# Altium PCB BMS_V3.PcbDoc (part 1 of 2)
Units mil, origin at the board's own origin, x right, y up, seen from the top; angles counter-clockwise.
Board outline 3937.01 x 3137.8 mil, 2 copper layers (Top Layer, Bottom Layer), stack 62.181 mil thick; 110 components, 133 nets, 421 pads, 75 vias.
Unrouted connection lines stored in the file: 4.
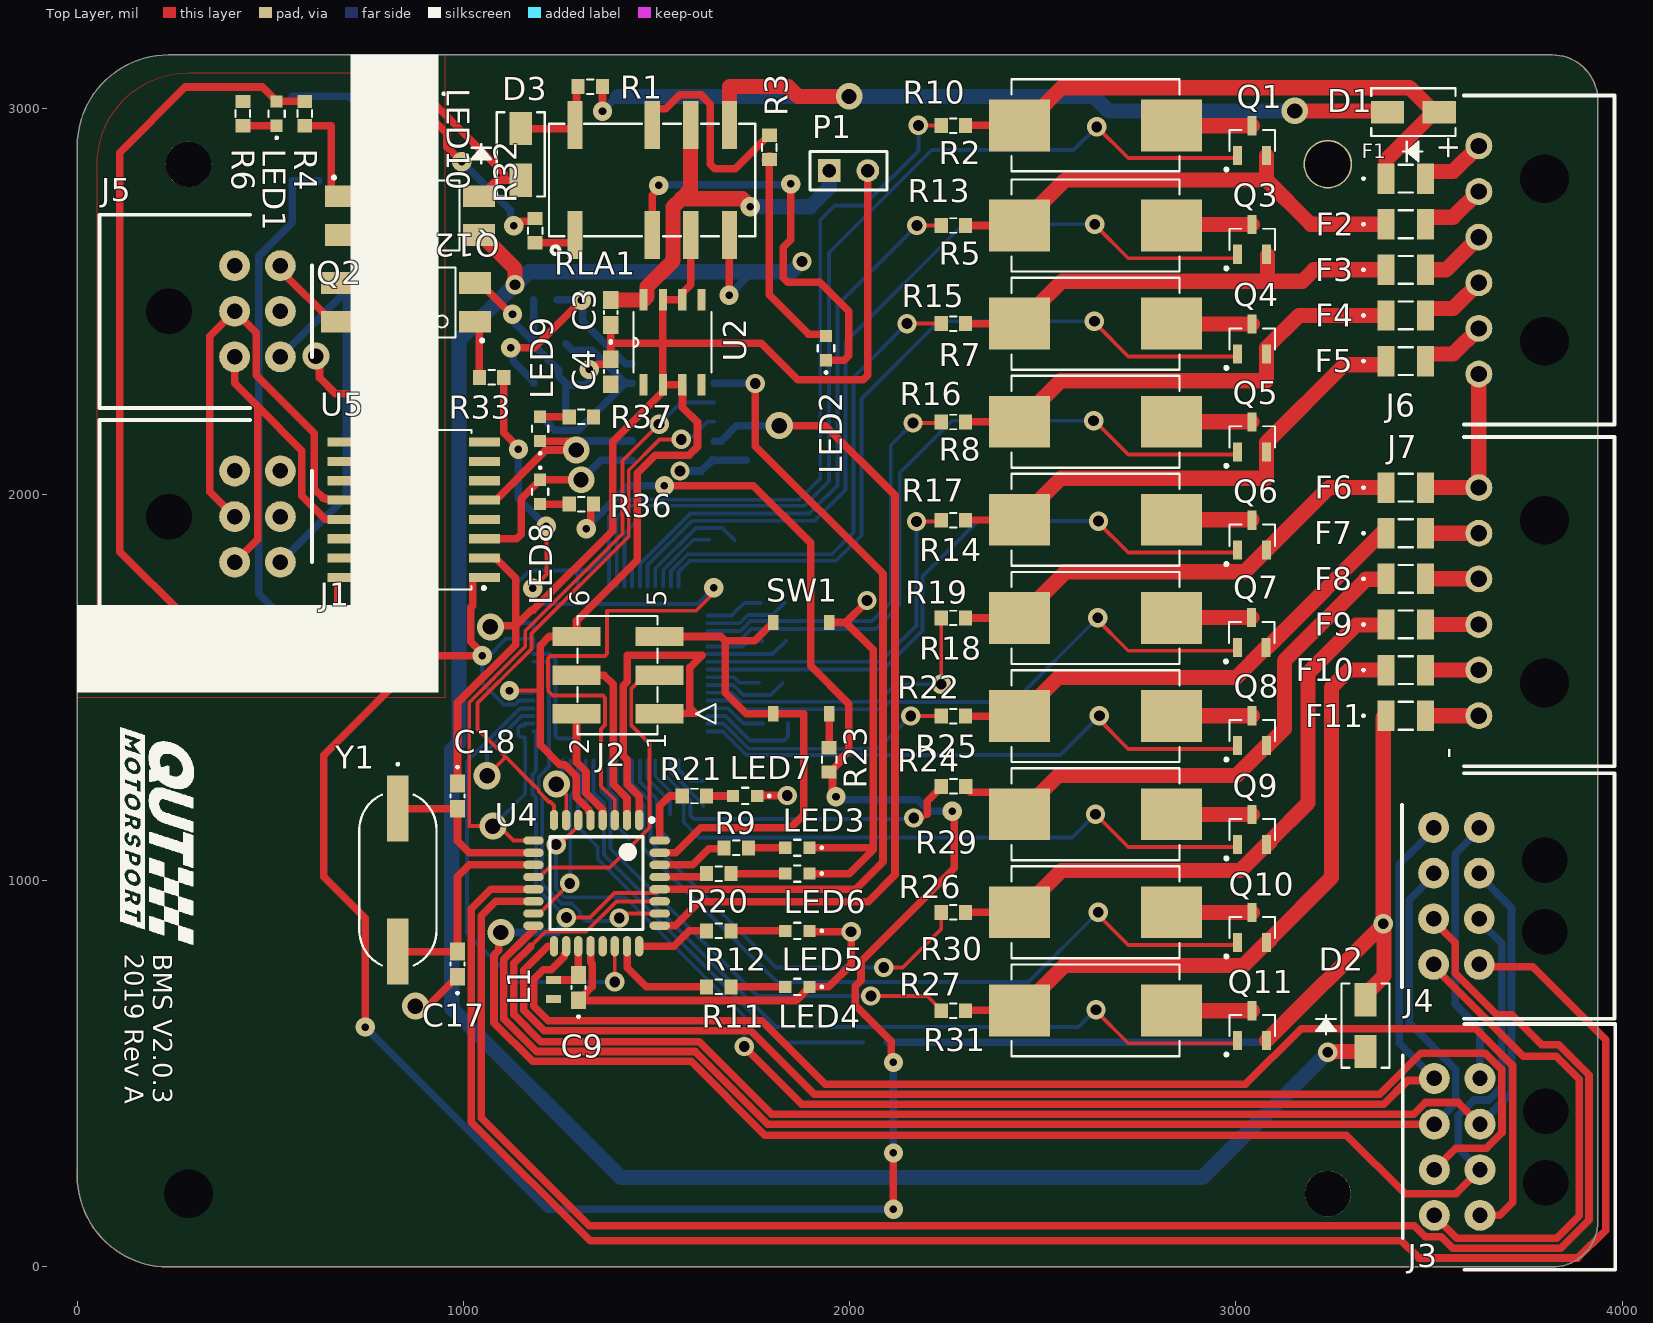
[diagram p0: Top Layer view]
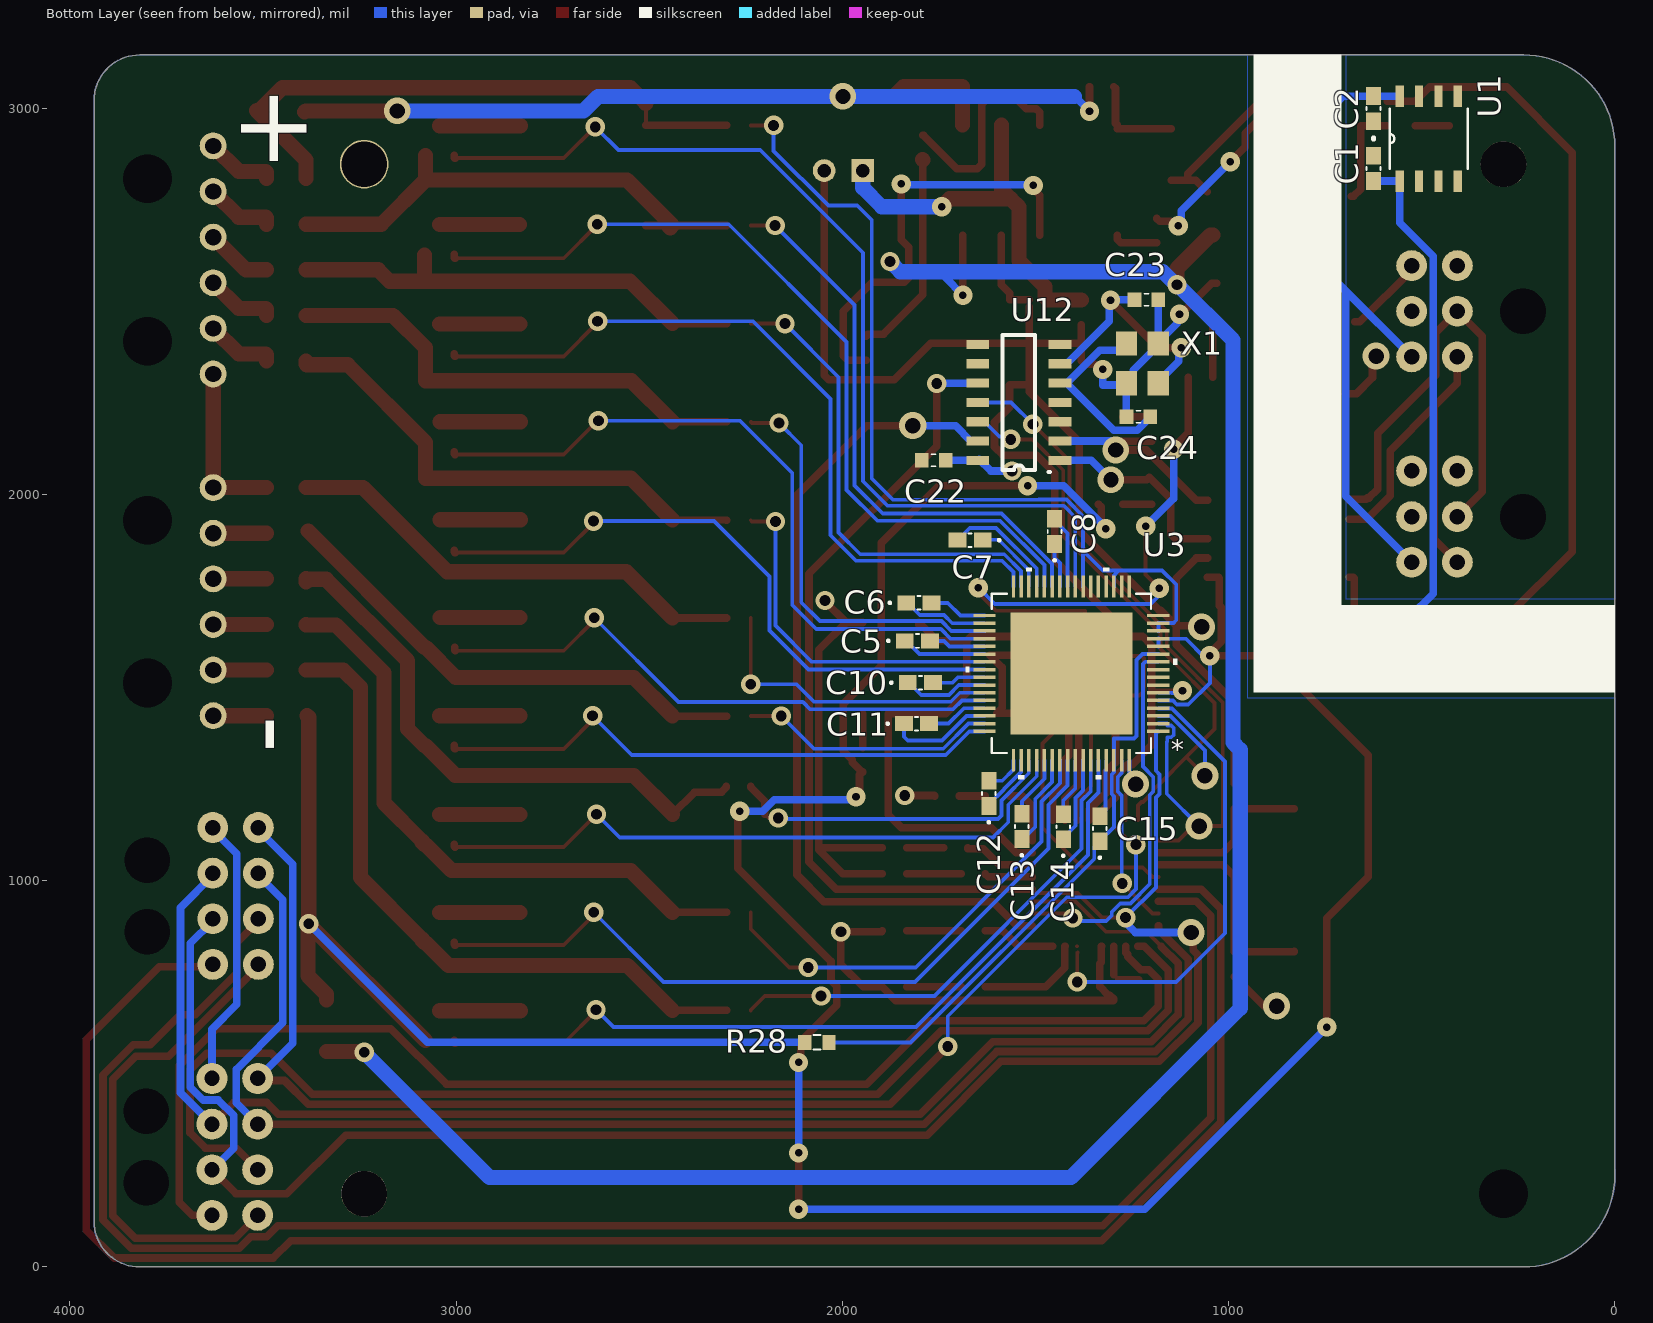
[diagram p1: Bottom Layer view, seen from below]

## Layer stack, top to bottom
Top Solder: solder mask 0.4, Solder Resist, Dk 3.5
Top Layer: signal copper 1.3661
Dielectric 1: dielectric 59.4488, FR-4, Dk 4.8
Bottom Layer: signal copper 1.3661
Bottom Solder: solder mask 0.4, Solder Resist, Dk 3.5

## Board outline
0,236.22 0,2901.57 cw(c236.22,2901.57) 236.22,3137.8 3818.9,3137.8 cw(c3818.9,3019.68) 3937.01,3019.68 3937.01,118.11 cw(c3818.9,118.11) 3818.9,0 236.22,0 cw(c236.22,236.22)

## Design rules (kind name [scope] priority, off if disabled: settings)
Clearance [All] p1: gap=6 ignorepadtopadclearanceinfootprint=FALSE except(0: Arc-Hole Track-Hole SMDPad-Hole THPad-Hole Via-Hole Fill-Hole Poly-Hole Region-Hole Text-Hole)
HoleSize [All] p1: absolutevalues=TRUE maxlimit=196.85 minlimit=11.81 maxpercent=80.000 minpercent=20.000
MinimumSolderMaskSliver [All] p1: minsoldermaskwidth=2.95
PlaneClearance "Schematic Power Plane Clearance_150" [InNet('NetD2_1')] p1: clearance=393.7
PlaneClearance "Schematic Power Plane Clearance_149" [InNet('NetD1_1')] p2: clearance=393.7
PlaneClearance "Schematic Power Plane Clearance_148" [InNet('NetLED7_2')] p3: clearance=393.7
PlaneClearance "Schematic Power Plane Clearance_147" [InNet('NetC6_2')] p4: clearance=393.7
PlaneClearance "Schematic Power Plane Clearance_146" [InNet('NetF11_1')] p5: clearance=393.7
PlaneClearance "Schematic Power Plane Clearance_145" [InNet('NetF3_1')] p6: clearance=393.7
PlaneClearance "Schematic Power Plane Clearance_144" [InNet('NetF10_2')] p7: clearance=393.7
PlaneClearance "Schematic Power Plane Clearance_143" [InNet('NetC18_2')] p8: clearance=393.7
PlaneClearance "Schematic Power Plane Clearance_142" [InNet('NetF2_1')] p9: clearance=393.7
PlaneClearance "Schematic Power Plane Clearance_141" [InNet('NetLED6_2')] p10: clearance=393.7
PlaneClearance "Schematic Power Plane Clearance_140" [InNet('NetLED5_2')] p11: clearance=393.7
PlaneClearance "Schematic Power Plane Clearance_139" [InNet('NetF6_1')] p12: clearance=393.7
PlaneClearance "Schematic Power Plane Clearance_138" [InNet('NetCR1_2')] p13: clearance=393.7
PlaneClearance "Schematic Power Plane Clearance_137" [InNet('NetF5_1')] p14: clearance=393.7
PlaneClearance "Schematic Power Plane Clearance_136" [InNet('NetF2_2')] p15: clearance=393.7
PlaneClearance "Schematic Power Plane Clearance_135" [InNet('NetF1_1')] p16: clearance=393.7
PlaneClearance "Schematic Power Plane Clearance_134" [InNet('NetF4_2')] p17: clearance=393.7
PlaneClearance "Schematic Power Plane Clearance_133" [InNet('NetC12_1')] p18: clearance=393.7
PlaneClearance "Schematic Power Plane Clearance_132" [InNet('NetC14_2')] p19: clearance=393.7
PlaneClearance "Schematic Power Plane Clearance_131" [InNet('NetF7_1')] p20: clearance=393.7
PlaneClearance "Schematic Power Plane Clearance_130" [InNet('NetC16_1')] p21: clearance=393.7
PlaneClearance "Schematic Power Plane Clearance_129" [InNet('NetC11_1')] p22: clearance=393.7
PlaneClearance "Schematic Power Plane Clearance_128" [InNet('NetC17_2')] p23: clearance=393.7
PlaneClearance "Schematic Power Plane Clearance_127" [InNet('NetF1_2')] p24: clearance=393.7
PlaneClearance "Schematic Power Plane Clearance_126" [InNet('NetF10_1')] p25: clearance=393.7
PlaneClearance "Schematic Power Plane Clearance_125" [InNet('NetC15_1')] p26: clearance=393.7
PlaneClearance "Schematic Power Plane Clearance_124" [InNet('NetC13_1')] p27: clearance=393.7
PlaneClearance "Schematic Power Plane Clearance_123" [InNet('NetLED3_1')] p28: clearance=393.7
PlaneClearance "Schematic Power Plane Clearance_122" [InNet('NetLED3_2')] p29: clearance=393.7
PlaneClearance "Schematic Power Plane Clearance_121" [InNet('NetLED4_2')] p30: clearance=393.7
PlaneClearance "Schematic Power Plane Clearance_120" [InNet('NetC8_1')] p31: clearance=393.7
PlaneClearance "Schematic Power Plane Clearance_119" [InNet('NetLED7_1')] p32: clearance=393.7
PlaneClearance "Schematic Power Plane Clearance_118" [InNet('NetF11_2')] p33: clearance=393.7
PlaneClearance "Schematic Power Plane Clearance_117" [InNet('NetC9_2')] p34: clearance=393.7
PlaneClearance "Schematic Power Plane Clearance_116" [InNet('NetF9_2')] p35: clearance=393.7
PlaneClearance "Schematic Power Plane Clearance_115" [InNet('NetF3_2')] p36: clearance=393.7
PlaneClearance "Schematic Power Plane Clearance_114" [InNet('NetC5_2')] p37: clearance=393.7
PlaneClearance "Schematic Power Plane Clearance_113" [InNet('NetJ2_3')] p38: clearance=393.7
PlaneClearance "Schematic Power Plane Clearance_112" [InNet('NetC12_2')] p39: clearance=393.7
PlaneClearance "Schematic Power Plane Clearance_111" [InNet('NetCR1_1')] p40: clearance=393.7
PlaneClearance "Schematic Power Plane Clearance_110" [InNet('NetC11_2')] p41: clearance=393.7
PlaneClearance "Schematic Power Plane Clearance_109" [InNet('NetC8_2')] p42: clearance=393.7
PlaneClearance "Schematic Power Plane Clearance_108" [InNet('NetC10_1')] p43: clearance=393.7
PlaneClearance "Schematic Power Plane Clearance_107" [InNet('NetF4_1')] p44: clearance=393.7
PlaneClearance "Schematic Power Plane Clearance_106" [InNet('NetC10_2')] p45: clearance=393.7
PlaneClearance "Schematic Power Plane Clearance_105" [InNet('NetLED5_1')] p46: clearance=393.7
PlaneClearance "Schematic Power Plane Clearance_104" [InNet('NetC7_2')] p47: clearance=393.7
PlaneClearance "Schematic Power Plane Clearance_103" [InNet('NetF9_1')] p48: clearance=393.7
PlaneClearance "Schematic Power Plane Clearance_102" [InNet('NetLED6_1')] p49: clearance=393.7
PlaneClearance "Schematic Power Plane Clearance_101" [InNet('NetF8_1')] p50: clearance=393.7
PlaneClearance "Schematic Power Plane Clearance_100" [InNet('NetLED2_1')] p51: clearance=393.7
PlaneClearance "Schematic Power Plane Clearance_99" [InNet('NetF8_2')] p52: clearance=393.7
PlaneClearance "Schematic Power Plane Clearance_98" [InNet('NetF6_2')] p53: clearance=393.7
PlaneClearance "Schematic Power Plane Clearance_97" [InNet('NetC13_2')] p54: clearance=393.7
PlaneClearance "Schematic Power Plane Clearance_96" [InNet('NetC14_1')] p55: clearance=393.7
PlaneClearance "Schematic Power Plane Clearance_95" [InNet('NetJ2_4')] p56: clearance=393.7
PlaneClearance "Schematic Power Plane Clearance_94" [InNet('NetC7_1')] p57: clearance=393.7
PlaneClearance "Schematic Power Plane Clearance_93" [InNet('NetJ2_1')] p58: clearance=393.7
PlaneClearance "Schematic Power Plane Clearance_92" [InNet('NetF7_2')] p59: clearance=393.7
PlaneClearance "Schematic Power Plane Clearance_91" [InNet('NetC15_2')] p60: clearance=393.7
PlaneClearance "Schematic Power Plane Clearance_90" [InNet('NetF5_2')] p61: clearance=393.7
PlaneClearance "Schematic Power Plane Clearance_89" [InNet('NetJ2_5')] p62: clearance=393.7
PlaneClearance "Schematic Power Plane Clearance_88" [InNet('NetC6_1')] p63: clearance=393.7
PlaneClearance "Schematic Power Plane Clearance_87" [InNet('NetLED2_2')] p64: clearance=393.7
PlaneClearance "Schematic Power Plane Clearance_86" [InNet('NetLED4_1')] p65: clearance=393.7
PlaneClearance "Schematic Power Plane Clearance_85" [InNet('+5')] p66: clearance=393.7
PlaneClearance "Schematic Power Plane Clearance_84" [InNet('NetU5_6')] p67: clearance=393.7
PlaneClearance "Schematic Power Plane Clearance_83" [InNet('NetU4_21')] p68: clearance=393.7
PlaneClearance "Schematic Power Plane Clearance_82" [InNet('NetU5_4')] p69: clearance=393.7
PlaneClearance "Schematic Power Plane Clearance_81" [InNet('NetU4_15')] p70: clearance=393.7
PlaneClearance "Schematic Power Plane Clearance_80" [InNetClass('GLV')] p71: clearance=196.85
PlaneClearance "Schematic Power Plane Clearance_79" [InNet('NetU4_30')] p72: clearance=393.7
PlaneClearance "Schematic Power Plane Clearance_78" [InNet('NetQ9_3')] p73: clearance=393.7
PlaneClearance "Schematic Power Plane Clearance_77" [InNet('NetQ11_1')] p74: clearance=393.7
PlaneClearance "Schematic Power Plane Clearance_76" [InNet('NetQ5_3')] p75: clearance=393.7
PlaneClearance "Schematic Power Plane Clearance_75" [InNet('NetQ4_1')] p76: clearance=393.7
PlaneClearance "Schematic Power Plane Clearance_74" [InNet('NetQ10_3')] p77: clearance=393.7
PlaneClearance "Schematic Power Plane Clearance_73" [InNet('NetLED8_2')] p78: clearance=393.7
PlaneClearance "Schematic Power Plane Clearance_72" [InNet('NetQ8_1')] p79: clearance=393.7
PlaneClearance "Schematic Power Plane Clearance_71" [InNet('NetQ6_1')] p80: clearance=393.7
PlaneClearance "Schematic Power Plane Clearance_70" [InNet('NetQ9_1')] p81: clearance=393.7
PlaneClearance "Schematic Power Plane Clearance_69" [InNet('NetQ4_3')] p82: clearance=393.7
PlaneClearance "Schematic Power Plane Clearance_68" [InNet('NetLED8_1')] p83: clearance=393.7
PlaneClearance "Schematic Power Plane Clearance_67" [InNet('NetQ7_3')] p84: clearance=393.7
PlaneClearance "Schematic Power Plane Clearance_66" [InNet('NetQ3_3')] p85: clearance=393.7
PlaneClearance "Schematic Power Plane Clearance_65" [InNet('NetQ10_1')] p86: clearance=393.7
PlaneClearance "Schematic Power Plane Clearance_64" [InNet('NetQ6_3')] p87: clearance=393.7
PlaneClearance "Schematic Power Plane Clearance_63" [InNet('NetQ1_3')] p88: clearance=393.7
PlaneClearance "Schematic Power Plane Clearance_62" [InNet('NetQ7_1')] p89: clearance=393.7
PlaneClearance "Schematic Power Plane Clearance_61" [InNet('NetQ1_1')] p90: clearance=393.7
PlaneClearance "Schematic Power Plane Clearance_60" [InNet('NetR3_2')] p91: clearance=393.7
PlaneClearance "Schematic Power Plane Clearance_59" [InNet('NetQ8_3')] p92: clearance=393.7
PlaneClearance "Schematic Power Plane Clearance_58" [InNet('NetQ5_1')] p93: clearance=393.7
PlaneClearance "Schematic Power Plane Clearance_57" [InNet('NetQ11_3')] p94: clearance=393.7
PlaneClearance "Schematic Power Plane Clearance_56" [InNet('NetQ3_1')] p95: clearance=393.7
PlaneClearance "Schematic Power Plane Clearance_55" [InNet('NetTH4_2')] p96: clearance=393.7
PlaneClearance "Schematic Power Plane Clearance_54" [InNet('NetTH1_2')] p97: clearance=393.7
PlaneClearance "Schematic Power Plane Clearance_53" [InNet('NetR26_1')] p98: clearance=393.7
PlaneClearance "Schematic Power Plane Clearance_52" [InNet('NetU2_5')] p99: clearance=393.7
PlaneClearance "Schematic Power Plane Clearance_51" [InNet('NetR15_1')] p100: clearance=393.7
PlaneClearance "Schematic Power Plane Clearance_50" [InNet('NetS1_3')] p101: clearance=393.7
PlaneClearance "Schematic Power Plane Clearance_49" [InNet('NetR16_1')] p102: clearance=393.7
PlaneClearance "Schematic Power Plane Clearance_48" [InNet('NetTH7_2')] p103: clearance=393.7
PlaneClearance "Schematic Power Plane Clearance_47" [InNet('NetR13_1')] p104: clearance=393.7
PlaneClearance "Schematic Power Plane Clearance_46" [InNet('NetS1_6')] p105: clearance=393.7
PlaneClearance "Schematic Power Plane Clearance_45" [InNet('NetTH3_2')] p106: clearance=393.7
PlaneClearance "Schematic Power Plane Clearance_44" [InNet('NetTH5_2')] p107: clearance=393.7
PlaneClearance "Schematic Power Plane Clearance_43" [InNet('NetTH2_2')] p108: clearance=393.7
PlaneClearance "Schematic Power Plane Clearance_42" [InNet('NetTH8_2')] p109: clearance=393.7
PlaneClearance "Schematic Power Plane Clearance_41" [InNet('NetR10_1')] p110: clearance=393.7
PlaneClearance "Schematic Power Plane Clearance_40" [InNet('NetR19_1')] p111: clearance=393.7
PlaneClearance "Schematic Power Plane Clearance_39" [InNet('NetU3_1')] p112: clearance=393.7
PlaneClearance "Schematic Power Plane Clearance_38" [InNet('NetR22_1')] p113: clearance=393.7
PlaneClearance "Schematic Power Plane Clearance_37" [InNet('NetR27_1')] p114: clearance=393.7
PlaneClearance "Schematic Power Plane Clearance_36" [InNet('NetTH6_2')] p115: clearance=393.7
PlaneClearance "Schematic Power Plane Clearance_35" [InNet('NetU2_4')] p116: clearance=393.7
PlaneClearance "Schematic Power Plane Clearance_34" [InNet('NetR17_1')] p117: clearance=393.7
PlaneClearance "Schematic Power Plane Clearance_33" [InNet('NetR24_1')] p118: clearance=393.7
PlaneClearance "Schematic Power Plane Clearance_32" [InNet('NetU3_39')] p119: clearance=393.7
PlaneClearance "Schematic Power Plane Clearance_31" [InNet('NetU3_31')] p120: clearance=393.7
PlaneClearance "Schematic Power Plane Clearance_30" [InNet('NetU3_8')] p121: clearance=393.7
PlaneClearance "Schematic Power Plane Clearance_29" [InNet('NetU3_9')] p122: clearance=393.7
PlaneClearance "Schematic Power Plane Clearance_28" [InNet('NetU3_7')] p123: clearance=393.7
PlaneClearance "Schematic Power Plane Clearance_27" [InNet('NetU3_27')] p124: clearance=393.7
PlaneClearance "Schematic Power Plane Clearance_26" [InNet('NetU3_22')] p125: clearance=393.7
PlaneClearance "Schematic Power Plane Clearance_25" [InNet('NetU4_6')] p126: clearance=393.7
PlaneClearance "Schematic Power Plane Clearance_24" [InNet('NetU3_3')] p127: clearance=393.7
PlaneClearance "Schematic Power Plane Clearance_23" [InNet('NetU3_64')] p128: clearance=393.7
PlaneClearance "Schematic Power Plane Clearance_22" [InNet('NetU3_4')] p129: clearance=393.7
PlaneClearance "Schematic Power Plane Clearance_21" [InNet('NetU3_43')] p130: clearance=393.7
PlaneClearance "Schematic Power Plane Clearance_20" [InNet('NetU3_47')] p131: clearance=393.7
PlaneClearance "Schematic Power Plane Clearance_19" [InNet('NetU3_35')] p132: clearance=393.7
PlaneClearance "Schematic Power Plane Clearance_18" [InNet('NetU3_55')] p133: clearance=393.7
PlaneClearance "Schematic Power Plane Clearance_17" [InNet('NetU3_5')] p134: clearance=393.7
PlaneClearance "Schematic Power Plane Clearance_16" [InNet('NetU3_2')] p135: clearance=393.7
PlaneClearance "Schematic Power Plane Clearance_15" [InNet('NetU3_21')] p136: clearance=393.7
PlaneClearance "Schematic Power Plane Clearance_14" [InNet('NetU3_23')] p137: clearance=393.7
PlaneClearance "Schematic Power Plane Clearance_13" [InNet('NetU3_20')] p138: clearance=393.7
PlaneClearance "Schematic Power Plane Clearance_12" [InNet('NetU3_51')] p139: clearance=393.7
PlaneClearance "Schematic Power Plane Clearance_11" [InNet('NetU4_2')] p140: clearance=393.7
PlaneClearance "Schematic Power Plane Clearance_10" [InNet('NetU3_59')] p141: clearance=393.7
PlaneClearance [All] p142: clearance=20
PolygonConnect [All] p1: connectstyle=Relief reliefconductorwidth=10 reliefentries=4 polygonreliefangle="90 Angle" airgapwidth=10
RoomDefinition BMS_V3 [InComponentClass('BMS_V3')] p1: confinementstyle=ConfineIn formatcopy=TRUE lockcomponents=FALSE outline 51.77,-46.44 4014.37,-46.44 4014.37,3091.36 51.77,3091.36
RoutingVias [All] p1: holewidth=19.68 width=50 viastyle="Through Hole" minholewidth=11.81 minwidth=50 maxholewidth=39.37 maxwidth=50
SilkToSolderMaskClearance [IsPad] p1: minsilkscreentomaskgap=1.97 clearancetoexposedcopper=TRUE
SolderMaskExpansion [All] p1: expansion=5.98
Width [All] p1: maxlimit=196.85 minlimit=5.98 preferedwidth=19.68 minimp=50.000000 maximp=50.000000 favimp=50.000000
26 further rules are at their usual default settings.

## Classes and differential pairs
polygon class +12: "Top Layer-No Net"
net class HV: +5 BATT+ BATT- BMS_fault BUS_CONNECT CAN_CS Data GND M\R\ MISO MISO_A MOSI MOSI_A NetC3_2 NetC5_1 NetC5_2 NetC6_1 NetC6_2 NetC7_1 NetC7_2 NetC8_1 NetC8_2 NetC9_2 NetC10_1 NetC10_2 NetC11_1 NetC11_2 NetC12_1 NetC12_2 NetC13_1 NetC13_2 NetC14_1 NetC14_2 NetC15_1 NetC15_2 NetC17_2 NetC18_2 NetD1_2 NetD2_1 NetD3_1 NetD3_2 NetF1_2 NetF2_1 NetF2_2 NetF3_1 NetF3_2 NetF4_1 NetF4_2 NetF5_1 NetF5_2 NetF6_1 NetF6_2 NetF7_1 NetF7_2 NetF8_1 NetF8_2 NetF9_1 NetF9_2 NetF10_1 NetF10_2 NetF11_2 NetLED2_1 NetLED2_2 NetLED3_2 NetLED4_2 NetLED5_2 NetLED6_2 NetLED7_2 NetLED8_1 NetLED8_2 NetLED9_1 NetLED9_2 NetLED10_2 NetQ1_1 NetQ1_3 NetQ3_1 NetQ3_3 NetQ4_1 NetQ4_3 NetQ5_1 NetQ5_3 NetQ6_1 NetQ6_3 NetQ7_1 NetQ7_3 NetQ8_1 NetQ8_3 NetQ9_1 NetQ9_3 NetQ10_1 NetQ10_3 NetQ11_1 NetQ11_3 NetQ12_1 NetR3_2 NetR9_1 NetR10_1 NetR11_1 NetR12_1 NetR13_1 NetR15_1 NetR16_1 NetR17_1 NetR19_1 NetR20_1 NetR21_1 NetR22_1 NetR23_1 NetR24_1 NetR26_1 NetR27_1 NetR32_2 NetS1_3 NetS1_6 NetU2_4 NetU2_5 NetU3_4 NetU3_7 NetU3_8 NetU3_9 NetU3_10 NetU3_16 NetU3_17 NetU3_18 NetU3_20 NetU3_21 NetU3_22 NetU3_23 NetU3_27 NetU3_31 NetU3_35 NetU3_39 NetU3_43 NetU3_47 NetU3_51 NetU3_55 NetU3_59 NetU3_63 NetU3_64 NetU4_14 NetU4_15 NetU4_21 NetU5_4 OSC1 OSC2 RESET SCK SCK_A SENSOR_A SENSOR_B SENSOR_C SENSOR_D ST_CLK
net class GLV: +12V GLV_5V GLV_GND NetJ1_1 NetJ1_2 NetJ5_6 NetLED1_1 NetQ2_1 NetU1_4 NetU1_5

## Components (designator, comment, footprint, x,y, rotation, side; value= is the part's Value field where it differs from the comment)
C1 "100nF" cap_UMK107ABJ400 624.61,2844.31 r270 bottom value=Value
C2 "0.33uF" cap_UMK107ABJ400 624.61,2998.84 r90 bottom value=Value
C3 "0.33uF" cap_UMK107ABJ400 1381.3,2471.26 r90 top value=Value
C4 "100nF" cap_UMK107ABJ400 1381.3,2317.74 r270 top value=Value
C5 "1uF" cap_UMK107ABJ400 1805.71,1620.89 r180 bottom value=Value
C6 "1uF" cap_UMK107ABJ400 1801.77,1719.31 r180 bottom value=Value
C7 "1uF" cap_UMK107ABJ400 1668.9,1881.71 r0 bottom value=Value
C8 "1uF" cap_UMK107ABJ400 1450.39,1904.35 r90 bottom value=Value
C9 "100nF" cap_UMK107ABJ400 1297.83,723.25 r90 top value=Value
C10 "1uF" cap_UMK107ABJ400 1797.83,1512.62 r180 bottom value=Value
C11 "1uF" cap_UMK107ABJ400 1807.68,1406.63 r180 bottom value=Value
C12 "1uF" cap_UMK107ABJ400 1620.67,1226.2 r90 bottom value=Value
C13 "1uF" cap_UMK107ABJ400 1535.04,1140.57 r90 bottom value=Value
C14 "1uF" cap_UMK107ABJ400 1427.76,1139.71 r90 bottom value=Value
C15 "1uF" cap_UMK107ABJ400 1333.27,1134.67 r90 bottom value=Value
C17 "16pF" cap_UMK107ABJ400 984.47,784.09 r90 top value=Value
C18 "16pF" cap_UMK107ABJ400 984.47,1219.09 r270 top value=Value
C22 "100nF" *CAPC1608X95 1763.39,2088.41 r0 bottom
C23 "22pF" *CAPC1608X95 1212.6,2503.76 r0 bottom
C24 "22pF" *CAPC1608X95 1233.46,2201 r180 bottom
D1 "VS-10MQ100HM35AT" DIODE_SMA 3459.25,2989.98 r0 top value=Value
D2 "VS-10MQ100HM35AT" DIODE_SMA 3335.24,624.82 r270 top value=Value
D3 "VS-10MQ100HM35AT" DIODE_SMA 1148.42,2880.3 r270 top value=Value
F1 "200mA" 0458Series 3439.57,2817.74 r0 top value=Value
F2 "200mA" 0458Series 3439.57,2699.63 r0 top value=Value
F3 "200mA" 0458Series 3439.57,2581.52 r0 top value=Value
F4 "200mA" 0458Series 3439.57,2463.41 r0 top value=Value
F5 "200mA" 0458Series 3439.57,2345.3 r0 top value=Value
F6 "200mA" 0458Series 3439.57,2017.74 r0 top value=Value
F7 "200mA" 0458Series 3439.57,1899.63 r0 top value=Value
F8 "200mA" 0458Series 3439.57,1781.52 r0 top value=Value
F9 "200mA" 0458Series 3439.57,1663.41 r0 top value=Value
F10 "200mA" 0458Series 3439.57,1545.3 r0 top value=Value
F11 "200mA" 0458Series 3439.57,1427.19 r0 top value=Value
J1 "Microfit 3.0 2x3" Microfit_2X3_R_TH 237.67,1942.74 r270 top
J2 "ISP Header" CONN_1241050-3_T 1400.2,1532.3 r90 top
J3 "Microfit 3.0 2x4" Microfit_2X4_R_TH 3801.77,310.85 r90 top
J4 "Microfit 3.0 2x4" Microfit_2X4_R_TH 3799.8,960.45 r90 top
J5 "Microfit 3.0 2x3" Microfit_2X3_R_TH 237.67,2474.23 r270 top
J6 "Microfit 3.0 1x6" Microfit_1X6_R_TH 3798.82,2607.11 r90 top
J7 "Microfit 3.0 1x6" Microfit_1X6_R_TH 3798.82,1722.46 r90 top
L1 "10uH" "SMD 0603_A" 1232.87,718.33 r90 top
LED1 "150060RS75000" LED_LTW-C193TS00 516.34,2986.04 r90 top value=Value
LED2 "150060RS75000" LED_LTW-C193TS00 1938.58,2378.76 r90 top value=Value
LED3 "150060RS75000" LED_LTW-C193TS00 1864.76,1085.45 r180 top value=Value
LED4 "150060RS75000" LED_LTW-C193TS00 1864.76,725 r180 top value=Value
LED5 "150060RS75000" LED_LTW-C193TS00 1864.76,870.01 r180 top value=Value
LED6 "150060RS75000" LED_LTW-C193TS00 1864.76,1018.52 r180 top value=Value
LED7 "150060RS75000" LED_LTW-C193TS00 1728.94,1219.42 r180 top value=Value
LED8 "150060RS75000" LED_LTW-C193TS00 1198.43,2006.52 r270 top value=Value
LED9 "150060RS75000" LED_LTW-C193TS00 1198.43,2169.51 r90 top value=Value
LED10 "150060RS75000" LED_LTW-C193TS00 886.42,3037.22 r180 top value=Value
P1 "Header 2" HDR1X2 1946.85,2838.41 r0 top
Q1 "PMV20XNEAR" SOT95P230X110-3N 3041.93,2916.16 r90 top
Q2 "FOD817CS" *SOIC254P1016X385-4N 861.42,2722.05 r0 top
Q3 "PMV20XNEAR" SOT95P230X110-3N 3041.93,2660.26 r90 top
Q4 "PMV20XNEAR" SOT95P230X110-3N 3041.93,2402.38 r90 top
Q5 "PMV20XNEAR" SOT95P230X110-3N 3041.93,2148.93 r90 top
Q6 "PMV20XNEAR" SOT95P230X110-3N 3041.93,1894.51 r90 top
Q7 "PMV20XNEAR" SOT95P230X110-3N 3040.78,1642.54 r90 top
Q8 "PMV20XNEAR" SOT95P230X110-3N 3041.93,1388.6 r90 top
Q9 "PMV20XNEAR" SOT95P230X110-3N 3041.93,1132.7 r90 top
Q10 "PMV20XNEAR" SOT95P230X110-3N 3041.93,878.76 r90 top
Q11 "PMV20XNEAR" SOT95P230X110-3N 3041.93,624.82 r90 top
Q12 "FOD817CS" *SOIC254P1016X385-4N 851.38,2497.05 r180 top
R1 "1.2K" RESC1608X55N 1328.35,3055.93 r0 top
R2 "4.7R" RES_SMF3_TYCO 2636.42,2955.53 r180 top value=Value
R3 "10K" RESC1608X55N 1791.93,2898.44 r90 top
R4 "1K" RESC1608X55N 589.17,2986.04 r90 top
R5 "4.7R" RES_SMF3_TYCO 2636.42,2696.27 r180 top value=Value
R6 "330R" RESC1608X55N 428.74,2986.04 r270 top
R7 "4.7R" RES_SMF3_TYCO 2636.42,2442.26 r180 top value=Value
R8 "4.7R" RES_SMF3_TYCO 2636.42,2188.25 r180 top value=Value
R9 "330R" RESC1608X55N 1706.3,1085.12 r0 top
R10 "3K" RESC1608X55N 2268.27,2954.74 r0 top
R11 "1K" RESC1608X55N 1661.02,725 r0 top
R12 "330R" RESC1608X55N 1661.02,870.01 r0 top
R13 "3K" RESC1608X55N 2268.27,2696.27 r0 top
R14 "4.7R" RES_SMF3_TYCO 2636.42,1934.24 r180 top value=Value
R15 "3K" RESC1608X55N 2268.27,2442.26 r0 top
R16 "3K" RESC1608X55N 2268.27,2187.51 r0 top
R17 "3K" RESC1608X55N 2268.27,1933.09 r0 top
R18 "4.7R" RES_SMF3_TYCO 2636.42,1680.23 r180 top value=Value
R19 "3K" RESC1608X55N 2268.27,1680.23 r0 top
R20 "330R" RESC1608X55N 1661.02,1018.52 r0 top
R21 "330R" RESC1608X55N 1598.03,1219.31 r0 top
R22 "3K" RESC1608X55N 2268.27,1426.22 r0 top
R23 "10K" RESC1608X55N 1946.85,1312.99 r270 top
R24 "3K" RESC1608X55N 2268.7,1244.09 r0 top
R25 "4.7R" RES_SMF3_TYCO 2636.42,1426.22 r180 top value=Value
R26 "3K" RESC1608X55N 2268.27,918.2 r0 top
R27 "3K" RESC1608X55N 2268.27,663.41 r0 top
R28 "3K" RESC1608X55N 2065.55,581.52 r0 bottom
R29 "4.7R" RES_SMF3_TYCO 2636.42,1172.21 r180 top value=Value
R30 "4.7R" RES_SMF3_TYCO 2636.42,918.2 r180 top value=Value
R31 "4.7R" RES_SMF3_TYCO 2636.42,664.19 r180 top value=Value
R32 "10K" RESC1608X55N 1185.63,2682.89 r270 top
R33 "1K" RESC1608X55N 1072.83,2303.15 r0 top
R36 "330R" RESC1608X55N 1305.2,1975.02 r180 top
R37 "330R" RESC1608X55N 1305.2,2201 r180 top
RLA1 "Part Number: 3-1462039-7" big_boi 1438.19,2814 r90 top value=Value
SW1 "PTS526 SM15 SMTR2 LFS" PTS526SK15SMTR2LFS 1874.61,1550.41 r90 top
U1 "L78L05ACD13TR" SOIC127P600X175-8N 481.64,2921.08 r90 bottom
U2 "L78L05ACD13TR" SOIC127P600X175-8N 1541.34,2393.76 r90 top
U3 "MAX14920ECB+" 21-0084C 1406.69,1536.63 r0 bottom value=Value
U4 "ATmega64M1-AU" 32A_L 1344.65,993.71 r270 top
U5 "TJA1052IT/5Y" SOIC127P1032X265-16N 871.65,1960.43 r180 top
U12 "MCP2517FD" "MCP2517FD SOIC" 1436.69,2088.25 r0 bottom
X1 "ABM8G-20.000MHZ-18-D2Y-T" "XTAL 3.2x2.5mm" 1223.03,2339.43 r90 bottom
Y1 "16MHZ" ABLS_Series 830.31,1001.79 r270 top value=Value

## Footprints (in the part's own frame and the unit in brackets; to place one, negate y for a bottom-side part, rotate by r counter-clockwise, add the part's x,y. Pads: shape width x height; smd on the part's side, far side on the other; paste and mask are expansions set on the pad)
21-0084C [mil]
  rect 58x9 smd paste+0 mask+0: 1(-225,150) 2(-225,130) 3(-225,110) 4(-225,90) 5(-225,70) 6(-225,50) 7(-225,30) 8(-225,10) 9(-225,-10) 10(-225,-30) 11(-225,-50) 12(-225,-70) 13(-225,-90) 14(-225,-110) 15(-225,-130) 16(-225,-150) 33(225,-150) 34(225,-130) 35(225,-110) 36(225,-90) 37(225,-70) 38(225,-50) 39(225,-30) 40(225,-10) 41(225,10) 42(225,30) 43(225,50) 44(225,70) 45(225,90) 46(225,110) 47(225,130) 48(225,150)
  rect 314.96x314.96 smd paste-59.06 mask+0: 6(0,0)
  rect 9x58 smd paste+0 mask+0: 17(-150,-225) 18(-130,-225) 19(-110,-225) 20(-90,-225) 21(-70,-225) 22(-50,-225) 23(-30,-225) 24(-10,-225) 25(10,-225) 26(30,-225) 27(50,-225) 28(70,-225) 29(90,-225) 30(110,-225) 31(130,-225) 32(150,-225) 49(150,225) 50(130,225) 51(110,225) 52(90,225) 53(70,225) 54(50,225) 55(30,225) 56(10,225) 57(-10,225) 58(-30,225) 59(-50,225) 60(-70,225) 61(-90,225) 62(-110,225) 63(-130,225) 64(-150,225)
  silkscreen extent -274,-274 274,274, body extent -206,-206 206,206, height 50
32A_L [mm] "Thin QFP, 32-Leads, Body 7x7mm, Pitch 0.8mm, IPC High Density"
  oval 1.35x0.55 smd: 1(-4.15,2.8) 2(-4.15,2) 3(-4.15,1.2) 4(-4.15,0.4) 5(-4.15,-0.4) 6(-4.15,-1.2) 7(-4.15,-2) 8(-4.15,-2.8) 17(4.15,-2.8) 18(4.15,-2) 19(4.15,-1.2) 20(4.15,-0.4) 21(4.15,0.4) 22(4.15,1.2) 23(4.15,2) 24(4.15,2.8)
  oval 0.55x1.35 smd: 9(-2.8,-4.15) 10(-2,-4.15) 11(-1.2,-4.15) 12(-0.4,-4.15) 13(0.4,-4.15) 14(1.2,-4.15) 15(2,-4.15) 16(2.8,-4.15) 25(2.8,4.15) 26(2,4.15) 27(1.2,4.15) 28(0.4,4.15) 29(-0.4,4.15) 30(-1.2,4.15) 31(-2,4.15) 32(-2.8,4.15)
  silkscreen extent -4.27,-3.05 3.05,3.75, body extent -3.5,-3.5 3.5,3.5, height 1.2
0458Series [mm]
  rect 1.1x2 smd paste+0 mask+0: 1(-1.3,0) 2(1.3,0)
  silkscreen extent -2.86,-0.91 0.47,0.91, body extent -1.6,-0.8 1.6,0.8, height 1.6
*CAPC1608X95 [mm]
  rect 0.9x0.97 smd: 1(-0.785,0) 2(0.785,0)
  silkscreen extent -0.15,-0.4 0.15,0.4
*SOIC254P1016X385-4N [mm]
  rect 2.09x1.44 smd: 1(-4.54,1.27) 2(-4.54,-1.27) 3(4.54,-1.27) 4(4.54,1.27)
  silkscreen extent -5.1,-2.3 3.25,2.6, body extent -3.25,-2.3 3.25,2.3, height 4
ABLS_Series [mil]
  rect 170x56 smd paste+0 mask+0: 1(-185,0) 2(185,0)
  silkscreen extent -303,-100 221,100, body extent -225,-100 225,100, height 165
big_boi [mm]
  rect 3.16x1 smd paste+0 mask+0: 1(-3.62,3.8) 2(-3.62,-1.28) 3(-3.62,-3.82) 4(-3.62,-6.36) 5(3.62,-6.36) 6(3.62,-3.82) 7(3.62,-1.28) 8(3.62,3.8)
  silkscreen extent -4.86,-8.06 3.7,5.5
cap_UMK107ABJ400 [mil]
  rect 46x39 smd paste+0 mask+0: 1(-32.5,0) 2(32.5,0)
  silkscreen extent -78,-18 4,18, body extent -33,-18 33,18, height 31
CONN_1241050-3_T [mm]
  rect 1.27x3.18 smd paste+0 mask+0: 1(-2.54,-2.73) 2(-2.54,2.73) 3(0,-2.73) 4(0,2.73) 5(2.54,-2.73) 6(2.54,2.73)
  silkscreen extent -3.89,-6.4 3.89,2.67, body extent -3.81,-2.42 3.81,2.42, height 5.84
DIODE_SMA [mil]
  rect 86x58 smd paste+0 mask+0: 1(-67,0) 2(67,0)
  silkscreen extent -109,-127 109,62, body extent -89,-55 89,55, height 90
HDR1X2 [mm] "Connector; Header; 2 Position"
  rect 1.5x1.5 hole 0.9: 1(0,0)
  round 1.5 hole 0.9: 2(2.54,0)
  silkscreen extent -1.27,-1.27 3.81,1.27
LED_LTW-C193TS00 [mm]
  rect 0.8x0.8 smd paste+0 mask+0: 1(-0.8,0) 2(0.8,0)
  silkscreen extent -1.68,-0.53 0.2,0.53, body extent -0.85,-0.45 0.85,0.45, height 0.8
"MCP2517FD SOIC" [mm]
  rect 1.5x0.6 smd: 1(0,0) 2(0,-1.27) 3(0,-2.54) 4(0,-3.81) 5(0,-5.08) 6(0,-6.35) 7(0,-7.62) 8(5.4,-7.62) 9(5.4,-6.35) 10(5.4,-5.08) 11(5.4,-3.81) 12(5.4,-2.54) 13(5.4,-1.27) 14(5.4,0)
  silkscreen extent 0.64,-8.25 3.76,0.76, body extent 0.74,-8.13 4.64,0.52, height 1.74
Microfit_1X6_R_TH [mm]
  round 1.77 hole 1.07: 1(7.5,4.32) 2(4.5,4.32) 3(1.5,4.32) 4(-1.5,4.32) 5(-4.5,4.32) 6(-7.5,4.32)
  round 3 hole 3.2 unplated: ""(-5.35,0) ""(5.35,0)
  silkscreen extent -10.82,-4.6 10.82,5.3, body extent -10.82,-4.6 10.82,5.3, height 5.64
Microfit_2X3_R_TH [mil]
  round 80 hole 40: 1(118.11,170) 2(0,170) 3(-118.11,170) 4(118.11,288.19) 5(0,288.19) 6(-118.11,288.19)
  round 0 hole 118.11 unplated mask+10: NC(0,0)
  silkscreen extent -250,-180 250,370, body extent -259,-181 259,301, height 348
Microfit_2X4_R_TH [mil]
  round 80 hole 40: 1(177.17,170) 2(59.06,170) 3(-59.06,170) 4(-177.17,170) 5(177.17,288.19) 6(59.06,288.19) 7(-59.06,288.19) 8(-177.17,288.19)
  round 0 hole 118.11 unplated mask+10: NC(-92.52,0) NC(92.52,0)
  silkscreen extent -318,-180 318,370, body extent -318,-181 318,301, height 348
PTS526SK15SMTR2LFS [mm]
  rect 1x0.7 smd: 1(-3,1.85) 2(3,1.85) 3(-3,-1.85) 4(3,-1.85)
  body extent -3.2,-2.55 3.2,2.55, height 1.5
RES_SMF3_TYCO [mil]
  rect 157.5x134 smd paste+0 mask+0: 1(-196.75,0) 2(196.75,0)
  silkscreen extent -218,-119 218,119, body extent -207,-108 207,108, height 197
RESC1608X55N [mm]
  rect 0.87x0.98 smd: 1(-0.8,0) 2(0.8,0)
  silkscreen extent -0.22,-0.48 0.22,0.48, body extent -0.85,-0.48 0.85,0.48, height 0.55
"SMD 0603_A" [mm] "Molded Inductor, 2-Leads, Body 1,6x0,8mm"
  rect 0.55x1 smd: 1(-0.625,0) 2(0.625,0)
  body extent -0.8,-0.4 0.8,0.4, height 0.78
SOIC127P600X175-8N [mil]
  rect 56x21 smd: 1(-110,75) 2(-110,25) 3(-110,-25) 4(-110,-75) 5(110,-75) 6(110,-25) 7(110,25) 8(110,75)
  silkscreen extent -78,-101 78,101, body extent -79,-98 79,98, height 69
SOIC127P1032X265-16N [mm]
  rect 2.06x0.6 smd: 1(-4.64,4.445) 2(-4.64,3.175) 3(-4.64,1.905) 4(-4.64,0.635) 5(-4.64,-0.635) 6(-4.64,-1.905) 7(-4.64,-3.175) 8(-4.64,-4.445) 9(4.64,-4.445) 10(4.64,-3.175) 11(4.64,-1.905) 12(4.64,-0.635) 13(4.64,0.635) 14(4.64,1.905) 15(4.64,3.175) 16(4.64,4.445)
  silkscreen extent -4.7,-5.25 3.8,5.25, body extent -3.8,-5.25 3.8,5.25, height 2.65
SOT95P230X110-3N [mm]
  rect 1.26x0.59 smd: 1(-0.98,0.95) 2(-0.98,-0.95) 3(0.98,0)
  silkscreen extent -2,-1.5 0.7,1.8, body extent -0.7,-1.5 0.7,1.5, height 1.1
"XTAL 3.2x2.5mm" [mm]
  rect 1.6x1.4 smd: 1(-1.3,-1.05) 2(1.3,-1.05) 3(1.3,1.05) 4(-1.3,1.05)
  body extent -1.6,-1.25 1.6,1.25, height 1

## Part data
C1 C2 C3 C4 C5 C6 C7 C8 C9 C10 C11 C12 C13 C14 C15 C17 C18: library part EMK107BJ105KA-T, "No Description Available", Built_By=EMA_UL_Team, Copyright="Copyright (C) 2018 Accelerated Designs. All rights reserved", Manufacturer_Part_Number=EMK107BJ105KA-T, RefDes=RefDes, Type=DEV, Vendor="Taiyo Yuden"
C22 C23 C24: library part CGJ3E3X7R1E334K080AB, "Cap Ceramic 0.33uF 25V X7R 10% SMD 0603 125°C Punched Paper T/R", Package="0603 TDK", Digi-Key_Part_Number=445-13347-1-ND, Digi-Key_Purchase_URL=https://www.digikey.com.au/product-detail/en/tdk-corporation/CGJ3E3X7R1E334K080AB/445-13347-1-ND/3955013?utm_source=snapeda&utm_medium=aggregator&utm_campaign=symbol, MF=TDK, MP=CGJ3E3X7R1E334K080AB, SnapEDA_Link=https://www.snapeda.com/parts/CGJ3E3X7R1E334K080AB/TDK-Lambda%20Americas%20Inc/view-part/?ref=snap
D1 D2 D3: "No Description Available", Manufacturer_Part_Number=VS-10MQ100NPBF, Built_By=EMA_UL_Team, Copyright="Copyright (C) 2018 Accelerated Designs. All rights reserved", RefDes=RefDes, Type=DEV, Vendor=Vishay
F1 F2 F3 F4 F5 F6 F7 F8 F9 F10 F11: library part 0458001.DR, "No Description Available", Built_By=EMA_UL_Team, Copyright="Copyright (C) 2018 Accelerated Designs. All rights reserved", Manufacturer_Part_Number=0458001.DR, RefDes=RefDes, Type=DEV, Vendor="Littelfuse Inc"
J1 J5: library part Microfit_2x3
J2: library part 826634-3, "Conn Unshrouded Header HDR 6 POS 2.54mm Solder RA Thru-Hole Automotive Carton", Package=None, Availability=Unavailable, EU_RoHS_Compliance=Compliant, MF="TE Connectivity", MP=826634-3, Price=None, SnapEDA_Link=https://www.snapeda.com/parts/826634-3/TE%20Connectivity%20AMP%20Connectors/view-part/?ref=snap, TE_purchase_URL=https://www.te.com/usa-en/product-826634-3.html?te_bu=Cor&te_type=disp&te_campaign=seda_glo_cor-seda-global-disp-prtnr-fy19-seda-model-bom-cta_sma-317_1&elqCampaignId=32493
J3 J4: library part Microfit_2x4
J6 J7: library part Microfit_1x6
L1: library part CMP-1392-00021-1, "FIXED IND 10UH 3MA 2.55 OHM SMD", Inductance="0.47 µH", Manufacturer="Wuerth Elektronik", PartNumber=74479763147, ComponentLink1Description="Manufacturer URL", ComponentLink1URL=http://www.we-online.com, ComponentLink2Description=Datasheet, ComponentLink2URL=http://katalog.we-online.de/kataloge/eisos/media/pdf/74479763147.pdf, PackageReference="SMD 0603_A"
LED1 LED2 LED3 LED4 LED5 LED6 LED7 LED8 LED9 LED10: library part LTST-C191TGKT, "No Description Available", Built_By=EMA_Justin, Copyright="Copyright (C) 2016 Accelerated Designs. All rights reserved", Manufacturer_Part_Number=LTST-C191TGKT, RefDes=RefDes, Type=DEV, Vendor=Lite-On
P1: "Header, 2-Pin", LatestRevisionDate=17-Jul-2002, LatestRevisionNote="Re-released for DXP Platform.", Publisher="Altium Limited"
Q1 Q3 Q4 Q5 Q6 Q7 Q8 Q9 Q10 Q11: library part SOT95P230X110-3N
Q2 Q12: "Optocoupler DC-IN 1-CH Transistor DC-OUT 4-Pin PDIP SMD Black Box", Package="SMD-4 Fairchild Semiconductor", Digi-Key_Part_Number=FOD817CS-ND, Digi-Key_Purchase_URL=https://www.digikey.com/product-detail/en/on-semiconductor/FOD817CS/FOD817CS-ND/1049610?utm_source=snapeda&utm_medium=aggregator&utm_campaign=symbol, MF=ON, MP=FOD817CS, SnapEDA_Link=https://www.snapeda.com/parts/FOD817CS/ON%20Semiconductor/view-part/?ref=snap
R1: library part 10K, "Res Thick Film 0603 1.2K Ohm 5% 0.25W_1/4W_ ±200ppm/C Molded SMD Automotive T/R", Package="0603 Rohm", Availability=Unavailable, MF=Rohm, MP=ESR03EZPJ103, Price=None, SnapEDA_Link=https://www.snapeda.com/parts/ESR03EZPJ103/Rohm/view-part/?ref=snap
R2 R5 R7 R8 R14 R18 R25 R29 R30 R31: library part SMW34R7JT, "No Description Available", Built_By=EMA_UL_Team, Copyright="Copyright (C) 2018 Accelerated Designs. All rights reserved", Manufacturer_Part_Number=SMW34R7JT, RefDes=RefDes, Type=DEV, Vendor="TE Connectivity"
R3 R23 R32: "Res Thick Film 0603 10K Ohm 5% 0.25W_1/4W_ ±200ppm/C Molded SMD Automotive T/R", Package="0603 Rohm", Availability=Unavailable, MF=Rohm, MP=ESR03EZPJ103, Price=None, SnapEDA_Link=https://www.snapeda.com/parts/ESR03EZPJ103/Rohm/view-part/?ref=snap
R4 R6 R10 R13 R15 R16 R17 R19 R22 R24 R26 R27 R28 R33: library part 10K, "Res Thick Film 0603 10K Ohm 5% 0.25W_1/4W_ ±200ppm/C Molded SMD Automotive T/R", Package="0603 Rohm", Availability=Unavailable, MF=Rohm, MP=ESR03EZPJ103, Price=None, SnapEDA_Link=https://www.snapeda.com/parts/ESR03EZPJ103/Rohm/view-part/?ref=snap
R9: library part 10K, "Res Thick Film 0603 220K Ohm 1% 0.1W_1/10W_ ±100ppm/C Molded SMD Automotive Paper T/R", Package="0603 Vishay", Availability=Unavailable, MF="Vishay Dale", MP=CRCW0603220KFKEA, Price=None, SnapEDA_Link=https://www.snapeda.com/parts/CRCW0603220KFKEA/Vishay%20Dale/view-part/?ref=snap
R11 R12 R20 R21 R36 R37: library part CRCW0603220KFKEA, "Res Thick Film 0603 220K Ohm 1% 0.1W_1/10W_ ±100ppm/C Molded SMD Automotive Paper T/R", Package="0603 Vishay", Availability=Unavailable, MF="Vishay Dale", MP=CRCW0603220KFKEA, Price=None, SnapEDA_Link=https://www.snapeda.com/parts/CRCW0603220KFKEA/Vishay%20Dale/view-part/?ref=snap
RLA1: library part 3-1462039-7, "No Description Available", Built_By=EMA_UL_Team, Copyright="Copyright (C) 2016 Accelerated Designs. All rights reserved", Manufacturer_Part_Number=3-1462039-7, RefDes=RefDes, Type=DEV, Vendor="TE Connectivity"
SW1: "TACT 5.2 X 5.2, 1.5 MM H, 160GF, / SPST-NO Top Actuated Surface Mount"
U1 U2: "L78L Series 20 V 100 mA Surface Mount Positive Voltage Regulator - SOIC-8", Package="SOIC-8 STMicroelectronics", Availability=Unavailable, MF=STMicroelectronics, MP=L78L05ACD13TR, Price=None, SnapEDA_Link=https://www.snapeda.com/parts/L78L05ACD13TR/STMicroelectronics/view-part/?ref=snap
U3: "No Description Available", Built_By=EMA_UL_Team, Copyright="Copyright (C) 2018 Accelerated Designs. All rights reserved", Manufacturer_Part_Number=MAX14920ECB+, RefDes=RefDes, Type=DEV, Vendor="Maxim Integrated Products"
U4: library part CMP-0096-00131-2, "8-bit AVR Microcontroller, 2.7-5.5V, 16MHz, 64KB Flash, 2KB EEPROM, 4KB SRAM, Industrial Grade (-40° to +85°C), 32-Pin TQFP", Code_JEDEC=MS-026-ABA, ComponentLink1Description="Manufacturer URL", ComponentLink1URL=http://www.atmel.com/, ComponentLink2Description="ATmega16M1/32M1/64M1 Datasheet", ComponentLink2URL=http://www.atmel.com/dyn/resources/prod_documents/doc8209.pdf, ComponentLink3Description="ATmega16M1/32M1/64M1 Summary", ComponentLink3URL=http://www.atmel.com/dyn/resources/prod_documents/8209S.pdf, DatasheetVersion="revD, Nov-2010", PackageDescription="32-Lead, 7x7x1.0 mm Body, 0.8mm Lead Pitch, Thin Profile Plastic Quad Flat Package (TQFP)", PackageReference=32A, PackageVersion="revC, Oct-2010", RevisionNote="DatasheetVersion & PackageVersion updated. URLs added."
X1: library part "Crystal 20Mhz 3.2x2.5mm", "20MHz ±20ppm Crystal 18pF 80 Ohms 4-SMD, No Lead", ComponentLink1Description=Digikey, ComponentLink1URL=https://www.digikey.com.au/product-detail/en/abracon-llc/ABM8G-20.000MHZ-18-D2Y-T/535-10271-1-ND/2218084, ComponentLink2Description=Datasheet, ComponentLink2URL=https://abracon.com/Resonators/ABM8G.pdf, ComponentLink3Description=Drawing, ComponentLink3URL=https://abracon.com/Support/PackageDrawing/Resonators/ABM8G.PDF
Y1: library part ABLS-28.63636MHZ, "No Description Available", Manufacturer_Part_Number=ABLS-28.63636MHZ-CL-RESR-A-1-G-F, Built_By=EMA_UL_Team, Copyright="Copyright (C) 2018 Accelerated Designs. All rights reserved", RefDes=RefDes, Type=DEV, Vendor=Abracon

## Free pads (board coordinates)
  round 118.11 hole 125.98 unplated: 2(287.99,189.78)
  round 118.11 hole 118.11 unplated: 3(287.99,2855.14) 5(3237.8,189.78)
  round 125.98 hole 118.11 unplated: 4(3237.8,2855.14)

## Via types
v1: diameter 50, hole 19.68, Top Layer to Bottom Layer, 25 vias
v2: diameter 50, hole 28, Top Layer to Bottom Layer, 24 vias
v3: diameter 50, hole 27.99, Top Layer to Bottom Layer, 14 vias
v4: diameter 70, hole 40, Top Layer to Bottom Layer, 8 vias
v5: diameter 68.9, hole 39.37, Top Layer to Bottom Layer, 4 vias

## Nets (pads, with @x,y where several pads share a name; then routed paths per layer and width w, separated by ;. In a path a pad name is that pad's centre, name@x,y a point inside that pad or via, vN(x,y) a via of type N, cw(c..) or ccw(c..) an arc to the next point about the centre after c; other vN are vias at no path point)
+5: C4.2 C22.1 J2.2 J3.1 J4.1 L1.1 R23.2 R36.1 R37.1 U2.1 U3.5 U3.12 U3.13 U4.4 U5.1 U12.14 | length 7613.5
  Top Layer w19.68: v1(746.06,621.06) 746.06,902.56 637.8,1010.83 637.8,1324.8 895.75,1582.75 v1(1048.28,1582.75) 1045.98,1585.05 1045.98,1591.06 1018.65,1618.4 1018.65,1707.36 1023.62,1712.33 1023.62,1783.46 1025.59,1785.43 U5.1@1054.33,1785.43 ; J2.2@1292.72,1432.3 1292.72,1306.08 1317.28,1281.52 1317.28,1227.02 1360.03,1184.27 1360.03,1157.47 U4.4@1360.4,1157.1 ; v1@1329.41,1931.33 1329.41,1967.74 R36.1@1336.69,1975.02 ; v1(1520.28,2022.46) 1750.59,2022.46 1898.72,1874.33 1898.72,1556.42 1997.64,1457.5 1997.64,1336.45 1974.55,1313.36 1974.55,1307.03 1949.02,1281.5 R23.2@1948.16,1281.5 ; R23.2@1946.85,1281.5 R23.2@1948.16,1281.5 ; v1(1964.57,1217.52) 1964.57,1225.72 1955.45,1234.84 1955.45,1274.21 R23.2@1948.16,1281.5 ; v1(2113.19,149.61) v1(2113.19,295.28) ; v1(2113.19,529.53) 2107.6,535.11 2107.6,584.06 2013.88,677.78 2013.88,726.88 2029.23,742.23 2029.23,791.34 2270.67,1032.78 2270.67,1175.2 v1(2265.75,1180.12)
  Bottom Layer w10: v1(1048.28,1582.75) 1048.28,1512.03 1104.18,1456.13 1134.01,1456.13 1144.01,1466.13 1181.19,1466.13 U3.5@1181.69,1466.63 ; v1@1060.88,1576.77 1110.4,1626.29 1181.35,1626.29 U3.13@1181.69,1626.63 U3.12@1181.69,1606.63
  Bottom Layer w19.68: v1(746.06,621.06) 1217.52,149.61 v1(2113.19,149.61) ; v1(1317.52,1911.24) 1317.52,1913.69 1426.29,2022.46 v1(1520.28,2022.46) ; v3(1560.63,2060.85) 1615.98,2060.85 1645.51,2090.37 1648.46,2087.42 U12.14@1649.29,2088.25 1649.37,2088.33 1732.4,2088.33 C22.1@1732.48,2088.41 ; v1(1964.57,1217.52) 1972.44,1209.65 2176.28,1209.65 2205.81,1180.12 v1(2265.75,1180.12) ; v1(2113.19,295.28) v1(2113.19,529.53) ; J4.1@3629.8,1131.71 3567.46,1069.37 3567.46,679.9 3631.77,615.59 J3.1@3631.77,488.01
+12V: C2.2 J1.4 J5.4 U1.8 | length 1691.1
  Bottom Layer w19.68: J1.4@525.86,1824.63 696.46,1995.23 696.46,2526.72 ; J5.4@525.86,2356.12 696.46,2526.72 ; U1.8@556.64,3031.08 556.77,3031.21 624.48,3031.21 C2.2@624.61,3031.34 703.33,3031.34 730.91,3003.76 730.91,2561.17 696.46,2526.72
BATT+: D1.1 R1.2 RLA1.5 | length 2551.6
  Top Layer w19.68: v1(1359.84,2991.95) R1.2@1359.84,3055.93
  Top Layer w39.37: RLA1.5@1688.58,2956.52 1688.58,3054.94 1689.57,3055.93 1840.74,3055.93 1866.15,3030.52 v5(1998.43,3030.52) 1998.43,3029.79 v5@2000.22,3028 ; v5(3152.17,2992.93) 3389.3,2992.93 D1.1@3392.25,2989.98
  Bottom Layer w19.68: v1(1359.84,2991.95) 1398.42,3030.52
  Bottom Layer w39.37: 1398.42,3030.52 v5(1998.43,3030.52) 2632.12,3030.52 2669.71,2992.93 v5(3152.17,2992.93)
BATT-: D2.2 Q2.3 RLA1.4 | length 5804.7
  Top Layer w19.68: v1(1687.6,2515.57) 1688.09,2516.06 1688.09,2670.98 RLA1.4@1688.58,2671.48 ; v2(3237.8,555.93) v2@3237.8,557.82
  Top Layer w39.37: Q2.3@1040.16,2672.05 1046.65,2672.05 1133.46,2585.24 v2(1133.46,2542.91) ; v3(1876.57,2603.17) v3@1878.61,2605.2 ; v2@3237.8,557.82 D2.2@3335.24,557.82
  Bottom Layer w19.68: v1(1687.6,2515.57) 1733.86,2561.83 1733.86,2576.59
  Bottom Layer w39.37: v3(1876.57,2603.17) 1850,2576.59 1733.86,2576.59 1170.08,2576.59 1136.4,2542.91 v2(1133.46,2542.91) 1131.67,2542.91 988.78,2400.03 988.78,1358.09 969.58,1338.89 969.58,669.92 1408.2,231.3 2913.17,231.3 v2(3237.8,555.93)
BMS_fault: R33.2 U4.3 | length 2272.8
  Top Layer w10: v1(1178.98,1756.89) 1214.57,1792.47 v1(1214.57,1917.32) ; U4.3@1391.52,1157.47 1391.52,1209.47 1356.3,1244.69 1356.3,1392.73 1366.87,1403.3 1366.87,1473.47 1361.01,1479.33 1231.17,1479.33 1219.36,1491.14 1219.36,1502.5 1219.12,1502.75 1219.12,1575.15 1225.66,1581.69 1366.19,1581.69 1372.05,1587.55 1372.05,1698.82 1602.36,1698.82 1647.64,1744.09 v1(1647.64,1758.86)
  Top Layer w19.68: R33.2@1104.33,2303.15 1104.33,2160.2 1142.32,2122.21 v1(1142.32,2117.13) ; U4.3@1391.52,1157.47 U4.3@1391.9,1157.1
  Bottom Layer w10: v1(1178.98,1756.89) 1178.98,1739.17 1201.62,1716.54 1605.31,1716.54 v1(1647.64,1758.86)
  Bottom Layer w19.68: v1(1142.32,2117.13) 1142.32,1989.57 v1(1214.57,1917.32)
BUS_CONNECT: F6.2 J6.6 J7.1 | length 432.1
  Top Layer w39.37: F6.2@3490.75,2017.74 J7.1@3628.74,2017.74 J6.6@3628.74,2311.83
CAN_CS: U4.25 U12.13 | length 2205.2
  Top Layer w19.68: U4.25@1508.04,883.48 1547.74,883.48 1609.95,945.69 2047.83,945.69 2117.23,1015.08 2117.23,1997.36 1936.63,2177.95 v4(1817.52,2177.95)
  Bottom Layer w19.68: U12.13@1649.29,2138.25 1667.01,2138.25 1706.71,2177.95 v4(1817.52,2177.95)
Data: J3.5 J4.5 U4.6 | length 3505.2
  Top Layer w9.84: v3(1239.82,1093.38) 1248.7,1093.38 1297.41,1142.09 U4.6@1297.41,1157.1
  Top Layer w19.68: v3(1726.97,570.69) 1876.39,421.27 3382.56,421.27 3444.06,482.76 3508.33,482.76 J3.5@3513.58,488.01
  Bottom Layer w9.84: v3(1239.82,1093.38) 1239.23,1092.79 1239.23,978.23 1260.28,957.19 1418.83,957.19 1726.97,649.05 v3(1726.97,570.69)
  Bottom Layer w19.68: J4.5@3511.61,1131.71 3422.34,1042.44 3422.34,579.26 J3.5@3513.58,488.01